# EAGLE board xambi_1.1 (EAGLE 6.5.0)
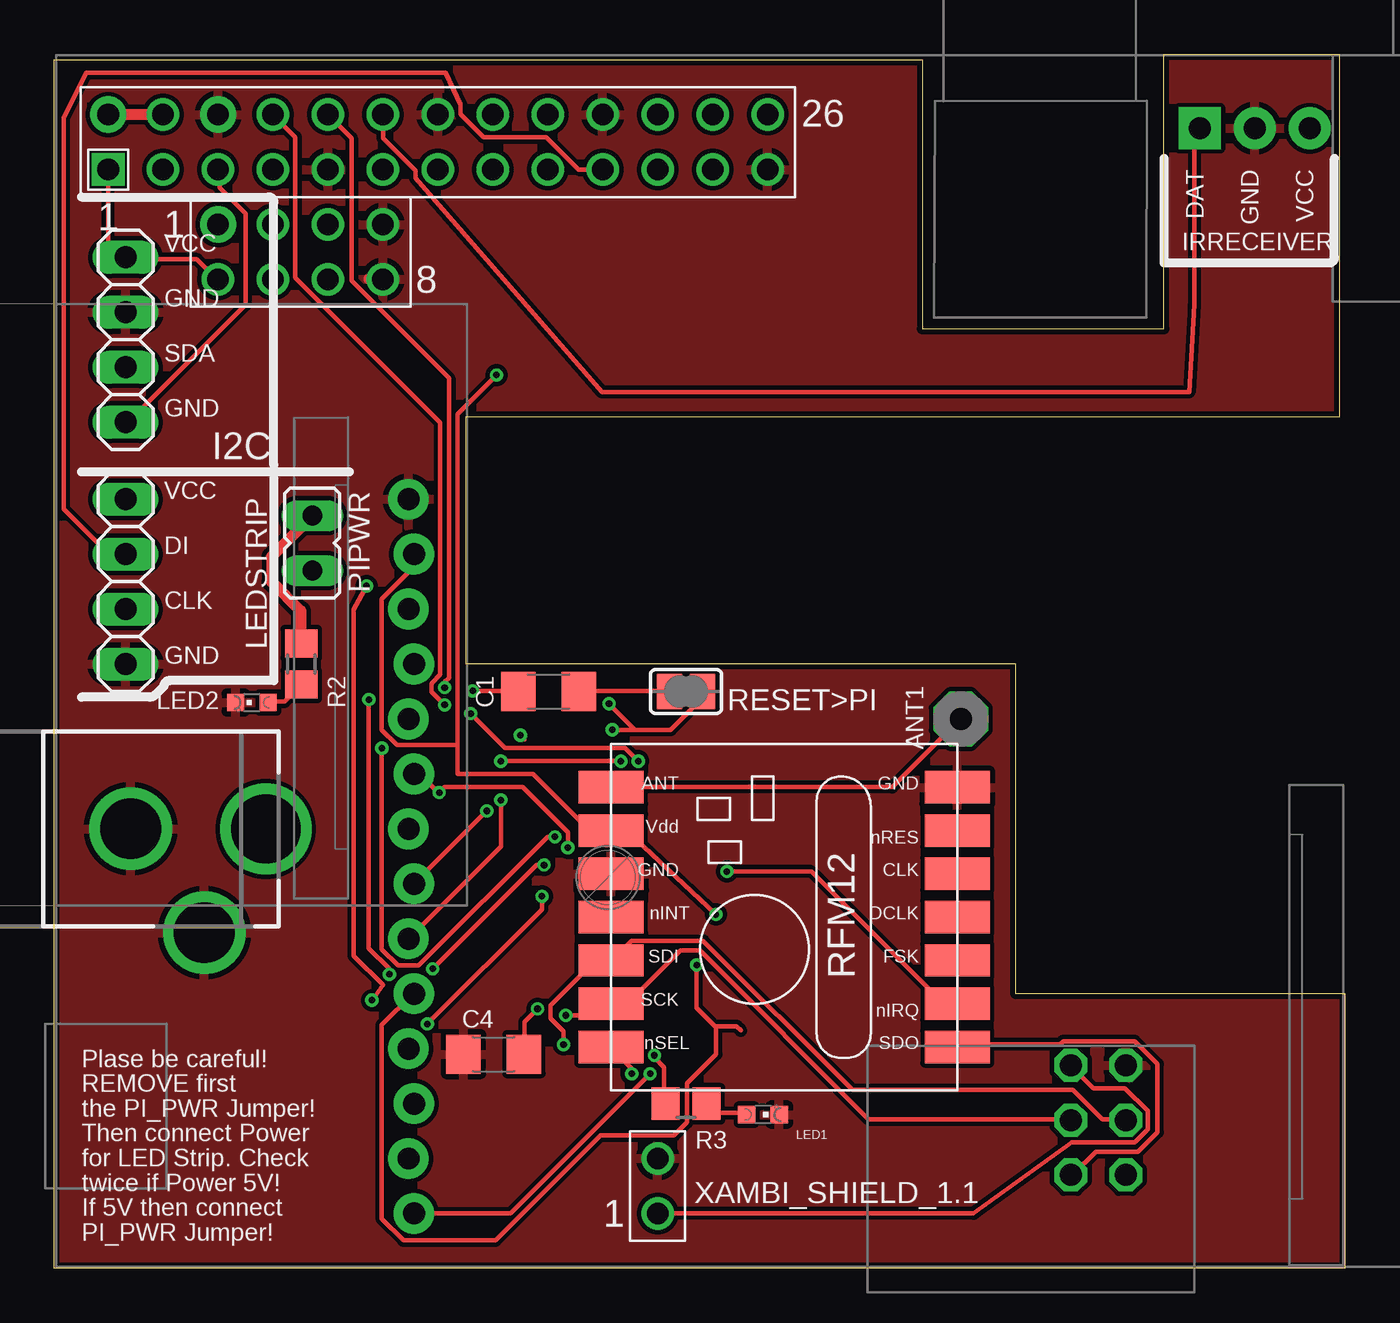
[diagram p0: board, top side]
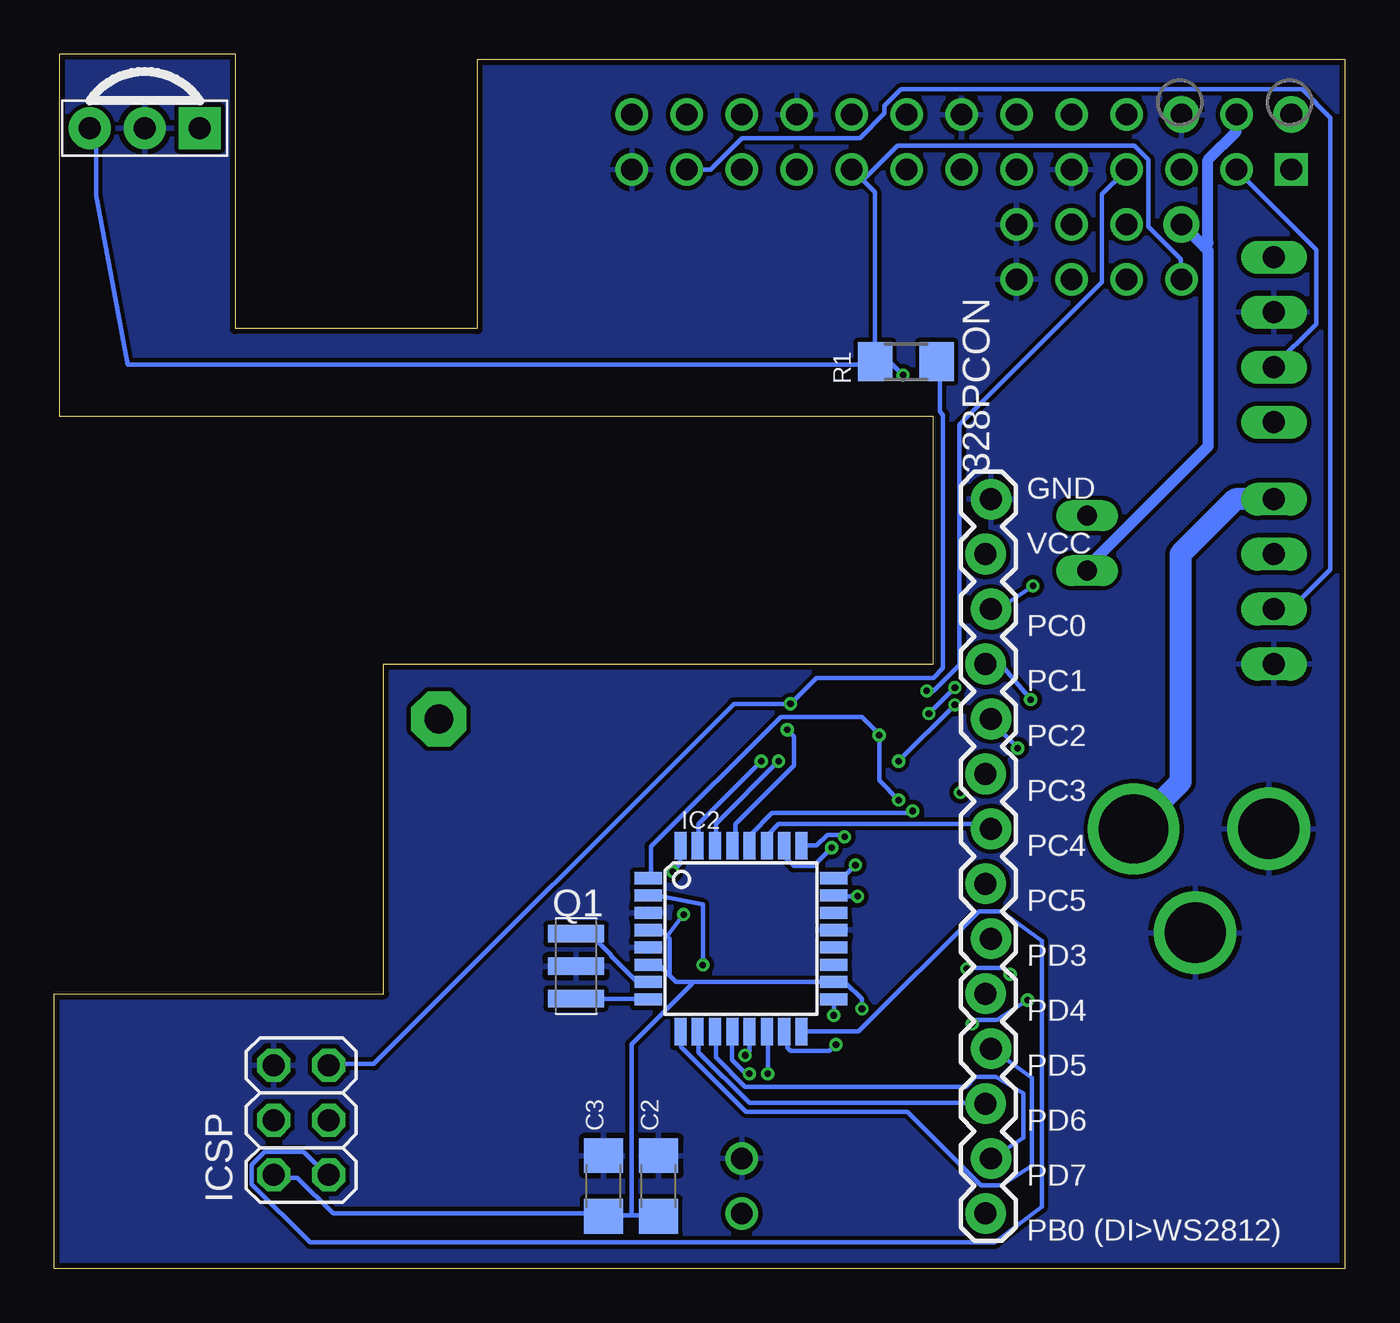
[diagram p1: board, bottom side, seen from below]

Size 59.69 x 56.13 mm. Coordinates in mm from the lower left corner, seen from the top.
Outline: 0,0 0,55.88 40.13,55.88 40.13,43.43 51.31,43.43 51.31,56.13 59.44,56.13 59.44,39.37 19.05,39.37 19.05,27.94 44.45,27.94 44.45,12.7 59.69,12.7 59.69,0 0,0
Copper layers (1*16): Top 0.035mm / dielectric 1.5mm / Bottom 0.035mm
Design rules "ITEADstudio_DRC": minimum track width 6mil, minimum drill 12mil, track to track 6mil, track to pad 6mil, pad to pad 6mil, via to via 6mil, smd to smd 0mil, copper to edge 10mil, drill to drill 10mil, minimum pad ring 10mil, minimum via ring 6mil, stop-mask expansion 2mil, vias tented up to drill 100mil, thermal gap 10mil
Net classes: 0 default: width 0.203 mm, drill 0.254 mm, clearance 0.152 mm; 1 power: width 0.508 mm, drill 0.305 mm, clearance 0.203 mm

## Footprints (pad centres in the part's own frame; a part is rotated, then mirrored left to right if it is on the bottom)
1X14_LOCK = drill 1.016 pad 1.88: 1 0,0.127; 2 2.54,-0.127; 3 5.08,0.127; 4 7.62,-0.127; 5 10.16,0.127; 6 12.7,-0.127; 7 15.24,0.127; 8 17.78,-0.127; 9 20.32,0.127; 10 22.86,-0.127; 11 25.4,0.127; 12 27.94,-0.127; 13 30.48,0.127; 14 33.02,-0.127
PAD-01 = drill 1.321 pad 2.54 octagon: 1 0,0
C1206 = smd 1.6 x 1.8: 1 -1.4,0; 2 1.4,0
DCJACK_2MM_PTH = drill 2.8: GND 0,7.35; GNDBREAK 4.8,10.75 | drill 3.2: PWR 0,13.6
1X04 = drill 1.016 long: 1 -3.81,0; 2 -1.27,0; 3 1.27,0; 4 3.81,0
TQFP32-08 = smd 1.27 x 0.559: 1 -4.293,2.8; 2 -4.293,2; 3 -4.293,1.2; 4 -4.293,0.4; 5 -4.293,-0.4; 6 -4.293,-1.2; 7 -4.293,-2; 8 -4.293,-2.8; 17 4.293,-2.8; 18 4.293,-2; 19 4.293,-1.2; 20 4.293,-0.4; 21 4.293,0.4; 22 4.293,1.2; 23 4.293,2; 24 4.293,2.8 | smd 0.559 x 1.27: 9 -2.8,-4.293; 10 -2,-4.293; 11 -1.2,-4.293; 12 -0.4,-4.293; 13 0.4,-4.293; 14 1.2,-4.293; 15 2,-4.293; 16 2.8,-4.293; 25 2.8,4.293; 26 2,4.293; 27 1.2,4.293; 28 0.4,4.293; 29 -0.4,4.293; 30 -1.2,4.293; 31 -2,4.293; 32 -2.8,4.293
2X03 = drill 1.016 octagon: 1 -2.54,-1.27; 2 -2.54,1.27; 3 0,-1.27; 4 0,1.27; 5 2.54,-1.27; 6 2.54,1.27
PNA460XM = drill 1.016 pad 1.93 square: 1 -2.54,0 | drill 1.016 pad 1.93: 2 0,0; 3 2.54,0
CHIPLED_0603 = smd 0.8 x 0.8: A 0,-0.75; C 0,0.75
JP1 = drill 0.914 long: 1 0,-1.27; 2 0,1.27
CSTCR6M = smd 0.8 x 2.6: 1 -1.5,0; 2 0,0; 3 1.5,0
R1206 = smd 1.6 x 1.803: 1 -1.422,0; 2 1.422,0
R0805 = smd 1.3 x 1.5: 1 -0.95,0; 2 0.95,0
SJ = smd 1.168 x 1.6: 1 -0.762,0; 2 0.762,0
RFM12 = smd 1.5 x 3: 1 -5,-10; 2 -3,-10; 3 -1,-10; 4 1,-10; 5 3,-10; 6 5,-10; 7 7,-10; 8 7,6; 9 5,6; 10 3,6; 11 1,6; 12 -1,6; 13 -3,6; 14 -5,6
RPI-B-V2 = drill 1 square: P1_1 0,0 | drill 1 pad 1.676: P1_2 0,2.54; P1_6 5.08,2.54; P5_1 5.08,-2.54 | drill 1: P1_3 2.54,0; P1_4 2.54,2.54; P1_5 5.08,0; P1_7 7.62,0; P1_8 7.62,2.54; P1_9 10.16,0; P1_10 10.16,2.54; P1_11 12.7,0; P1_12 12.7,2.54; P1_13 15.24,0; P1_14 15.24,2.54; P1_15 17.78,0; P1_16 17.78,2.54; P1_17 20.32,0; P1_18 20.32,2.54; P1_19 22.86,0; P1_20 22.86,2.54; P1_21 25.4,0; P1_22 25.4,2.54; P1_23 27.94,0; P1_24 27.94,2.54; P1_25 30.48,0; P1_26 30.48,2.54; P5_2 5.08,-5.08; P5_3 7.62,-2.54; P5_4 7.62,-5.08; P5_5 10.16,-2.54; P5_6 10.16,-5.08; P5_7 12.7,-2.54; P5_8 12.7,-5.08; P6_1 25.4,-48.26; P6_2 25.4,-45.72

## Placement (x,y rotation side)
328PCON  M14LOCK  [1X14_LOCK]  16.51,35.56 270 bottom
ANT1  [PAD-01]  41.91,25.4 0 top
C1  100n  [C1206]  22.86,26.67 0 top
C2  100n  [C1206]  31.75,3.81 90 bottom
C3  4.7µF  [C1206]  34.29,3.81 90 bottom
C4  4,7µF  [C1206]  20.32,9.91 0 top
CN1  LEDPower 5v/12V  [DCJACK_2MM_PTH]  -3.81,20.32 270 top
I2C  [1X04]  3.3,42.93 90 top
IC2  MEGA368  [TQFP32-08]  27.94,15.24 0 bottom
ICSP  [2X03]  48.26,6.86 90 bottom
IRRECEIVER  PNA460XM  [PNA460XM]  55.5,52.7 180 bottom
LED1  PB1  [CHIPLED_0603]  32.77,7.11 270 top
LED2  red  [CHIPLED_0603]  9.14,26.16 90 top
LEDSTRIP  [1X04]  3.3,31.75 270 top
PIPWR  [JP1]  11.94,33.53 0 top
Q1  16MHz  [CSTCR6M]  35.56,13.97 270 bottom
R1  10k  [R1206]  20.32,41.91 180 bottom
R2  680R  [R0805]  11.43,27.94 90 top
R3  680  [R0805]  29.21,7.62 180 top
RESET>PI  [SJ]  29.21,26.67 0 top
U$1  RFM12_SMDSMD  [RFM12]  31.75,15.24 90 top
XAMBI_SHIELD_1.1  XPIX Development / 2014  [RPI-B-V2]  2.5,50.8 0 top

## Library data of the parts
328PCON = SparkFun-Connectors
ANT1 = discrete
C1-C4 R1-R3 = rcl
CN1 IRRECEIVER LED1 LED2 = _adafruit
I2C ICSP LEDSTRIP = pinhead
IC2 = avr-7
PIPWR RESET>PI = jumper
Q1 = murata-filter; MPN: CSTCR6M00G53-R0; OC_FARNELL: 1170434; OC_NEWARK: 25M8759
U$1 = rfm_12
XAMBI_SHIELD_1.1 = raspberry

## Nets
+3V3: 328PCON.2 C2.1 C3.1 C4.2 I2C.4 IC2.4 IC2.6 IC2.18 ICSP.2 IRRECEIVER.3 R1.2 U$1.9 XAMBI_SHIELD_1.1.P1_1 XAMBI_SHIELD_1.1.P1_17 XAMBI_SHIELD_1.1.P5_2
+5V [power]: PIPWR.2 R2.2
+12V [power]: CN1.PWR LEDSTRIP.1
_RESET: C1.1 XAMBI_SHIELD_1.1.P1_7
ANTENNA: ANT1.1 U$1.8
CLK: LEDSTRIP.3 XAMBI_SHIELD_1.1.P1_23
DI: LEDSTRIP.2 XAMBI_SHIELD_1.1.P1_19
GND [power]: 328PCON.1 C2.2 C3.2 C4.1 CN1.GND CN1.GNDBREAK I2C.3 IC2.3 IC2.5 IC2.21 ICSP.6 IRRECEIVER.2 LED1.C LED2.C LEDSTRIP.4 Q1.2 U$1.7 U$1.10 XAMBI_SHIELD_1.1.P1_6 XAMBI_SHIELD_1.1.P1_9 XAMBI_SHIELD_1.1.P1_14 XAMBI_SHIELD_1.1.P1_20 XAMBI_SHIELD_1.1.P1_25 XAMBI_SHIELD_1.1.P5_7 XAMBI_SHIELD_1.1.P5_8 XAMBI_SHIELD_1.1.P6_2
GPIO30: XAMBI_SHIELD_1.1.P5_5
GPIO31: XAMBI_SHIELD_1.1.P5_6
I2C0_SCL/GPIO29: XAMBI_SHIELD_1.1.P5_4
I2C0_SDA/GPIO28: XAMBI_SHIELD_1.1.P5_3
IRINPUT: IRRECEIVER.1 XAMBI_SHIELD_1.1.P1_12
IRQ: IC2.32 U$1.2
MISO: IC2.16 ICSP.1 U$1.1
MOSI: IC2.15 ICSP.4 U$1.12
N$1: C1.2 RESET>PI.1
N$2: IC2.7 Q1.1
N$3 [power]: PIPWR.1 XAMBI_SHIELD_1.1.P1_2 XAMBI_SHIELD_1.1.P1_4 XAMBI_SHIELD_1.1.P5_1
N$4: IC2.8 Q1.3
N$7: LED2.A R2.1
N$19: LED1.A R3.1
N$20: IC2.13 R3.2
PB0: 328PCON.14 IC2.12
PC0: 328PCON.3 IC2.23
PC1: 328PCON.4 IC2.24
PC2: 328PCON.5 IC2.25
PC3: 328PCON.6 IC2.26
PC4: 328PCON.7 IC2.27
PC5: 328PCON.8 IC2.28
PD3: 328PCON.9 IC2.1
PD4: 328PCON.10 IC2.2
PD5: 328PCON.11 IC2.9
PD6: 328PCON.12 IC2.10
PD7: 328PCON.13 IC2.11
RESET: IC2.29 ICSP.5 R1.1 RESET>PI.2 XAMBI_SHIELD_1.1.P6_1
RX: IC2.30 XAMBI_SHIELD_1.1.P1_8
SCK: IC2.17 ICSP.3 U$1.13
SCL: I2C.1 XAMBI_SHIELD_1.1.P1_5
SDA: I2C.2 XAMBI_SHIELD_1.1.P1_3
SEL: IC2.14 U$1.14
TX: IC2.31 XAMBI_SHIELD_1.1.P1_10

## Tracks (layer width: path | path; a pad name or v marks a point on that pad's centre or on a via)
+3V3  (via drill 0.3)
  Top 0.203: v30.59,16.36 26.5,20.2 25.85,20.2 U$1.9 24.75,20.25 22.15,22.85 18.65,22.85 18.65,24.2 | 7.6,45.75 XAMBI_SHIELD_1.1.P5_2 7.5,45.75 6.6,46.65 3.45,46.65 I2C.4 2.5,47.05 XAMBI_SHIELD_1.1.P1_1 | 22.85,50.8 XAMBI_SHIELD_1.1.P1_17 | 18.65,24.2 18.65,39.5 v20.45,41.3 | 18.65,24.2 15.85,24.2 15.15,24.9 15.15,30.95 16.6,32.4 16.6,33 328PCON.2 | v22.35,12 21.75,11.4 21.75,10.05 C4.2
  Bottom 0.203: 33,2.45 34.25,2.45 C3.1 34.35,2.55 46.8,2.55 48.45,4.2 49.5,4.2 ICSP.2 | 33,2.45 31.75,2.45 C2.1 | 30.2,13.25 30.95,13.25 31.3,13.6 | 30.2,13.25 IC2.18 23.55,13.2 23.1,13.2 22.35,12.45 v22.35,12 | 31.3,13.6 31.7,14 32.2,14 IC2.6 | 31.35,15.35 31.25,15.25 31.25,13.65 31.3,13.6 | 31.35,15.35 31.6,15.6 32.2,15.6 IC2.4 | 33,2.45 33,10.35 30.2,13.15 30.2,13.25 | 31.35,15.35 v30.59,16.36 | 21.75,41.95 21.75,49.75 22.8,50.8 XAMBI_SHIELD_1.1.P1_17 22.25,50.35 20.7,51.9 9.75,51.9 9.1,51.25 9.1,48.15 7.6,46.65 7.6,45.75 XAMBI_SHIELD_1.1.P5_2 | 21.75,41.95 21.75,41.78 56.28,41.78 57.75,49.6 57.75,52.7 IRRECEIVER.3 | 21.75,41.95 R1.2 21.65,42.5 v20.45,41.3
+5V
  Top 0.508: R2.2 11.4,28.9 11.4,30.4 10.05,31.75 10.05,32.9 11.9,34.75 PIPWR.2
+12V
  Bottom 1.016: LEDSTRIP.1 5.08,35.56 7.62,33.02 7.62,22.49 CN1.PWR
_RESET  (via drill 0.3)
  Top 0.203: v19.35,26.7 21.45,26.7 C1.1
  Bottom 0.203: v19.35,26.7 19.05,26.7 17.85,27.9 17.85,39 11.25,45.6 11.25,49.65 10.2,50.7 XAMBI_SHIELD_1.1.P1_7
ANTENNA
  Top 0.203: U$1.8 38.75,22.25 ANT1.1
CLK
  Bottom 0.203: XAMBI_SHIELD_1.1.P1_23 29.35,50.8 27.9,52.25 22.45,52.25 21.3,53.4 21.3,53.75 20.55,54.5 2,54.5 0.7,53.2 0.7,32.3 2.5,30.5 LEDSTRIP.3
DI
  Top 0.203: XAMBI_SHIELD_1.1.P1_19 24.25,50.8 22.75,52.3 19.85,52.3 18.8,53.35 18.8,53.8 18.1,55.26 1.49,55.26 0.45,53.2 0.45,35.1 2.5,33.05 LEDSTRIP.2
GND
  Top 0.508: 2.5,44.55 I2C.3 | XAMBI_SHIELD_1.1.P5_7 15.15,48.25 | 14.55,45.75 XAMBI_SHIELD_1.1.P5_8
  Top 0.635: U$1.10 25.65,18.3 25.58,18.41
  Bottom 0.508: 31.85,14.85 IC2.5
  pour Top: 0,0 0,55.88 59.69,55.88 59.69,0
  pour Bottom: 0,0 0,55.88 59.69,55.88 59.69,0
IRINPUT
  Top 0.203: XAMBI_SHIELD_1.1.P1_12 15.2,52.25 16.7,50.75 16.7,50.4 25.32,40.51 52.47,40.51 52.7,44.55 52.7,52.7 IRRECEIVER.1
IRQ  (via drill 0.3)
  Top 0.203: v31.1,18.35 35,18.35 41.1,12.25 U$1.2
  Bottom 0.203: v31.1,18.35 30.75,18.7 30.75,19.5 IC2.32
MISO
  Top 0.203: U$1.1 41.85,10.35 46.5,10.35 46.65,10.5 49.95,10.5 51,9.45 51,6.3 50.1,5.4 48.15,5.4 47.1,4.35 ICSP.1
  Bottom 0.203: IC2.16 25.05,10.95 22.5,10.95 16.95,16.5 15.9,16.5 14.04,15.15 14.04,2.85 16.2,1.2 47.85,1.2 50.55,3.9 50.55,4.8 49.95,5.4 48.15,5.4 47.1,4.35 ICSP.1
MOSI  (via drill 0.3)
  Top 0.203: v23.55,10.35 23.55,10.95 22.95,11.55 22.95,12.15 24.9,14.1 25.65,14.1 U$1.12 25.8,14.25 26.7,15.15 30,15.15 36.9,8.25 47.1,8.25 48.45,6.9 49.5,6.9 ICSP.4
  Bottom 0.203: v23.55,10.35 23.85,10.05 25.65,10.05 25.8,10.2 25.8,10.8 IC2.15
N$1
  Top 0.203: RESET>PI.1 28.35,26.7 24.3,26.7 C1.2
N$2
  Bottom 0.203: IC2.7 32.25,13.25 32.75,13.25 33.95,14.45 33.95,14.5 34.9,15.45 35.55,15.45 Q1.1
N$3
  Top 0.508: XAMBI_SHIELD_1.1.P1_4 5,53.35 XAMBI_SHIELD_1.1.P1_2
  Bottom 0.508: 6.53,47.23 7.55,48.25 XAMBI_SHIELD_1.1.P5_1 | 6.53,47.23 6.35,47.05 6.35,38 11.9,32.45 11.9,32.3 PIPWR.1 | XAMBI_SHIELD_1.1.P1_4 5.05,53.3 5.05,52.55 6.35,51.25 6.35,47.4 6.53,47.23
N$4
  Bottom 0.203: IC2.8 32.25,12.45 35.55,12.45 Q1.3
N$7
  Top 0.203: R2.1 11.4,26.95 10.65,26.2 9.9,26.2 9.9,26.25 LED2.A
N$19
  Top 0.203: LED1.A 31.95,7.2 30.6,7.2 30.3,7.5 R3.1
N$20  (via drill 0.3)
  Top 0.203: v27.75,9.85 27.75,9.75 28.2,9.3 28.2,7.65 R3.2
  Bottom 0.203: v27.75,9.85 27.55,10.05 27.55,10.9 IC2.13
PB0  (via drill 0.3)
  Top 0.203: v27.55,9 21.1,2.55 328PCON.14
  Bottom 0.203: v27.55,9 27.7,9 28.35,9.65 28.35,10.9 IC2.12
PC0  (via drill 0.3)
  Top 0.203: v22.55,17.2 22.55,16.6 v17.25,11.3 | v14.69,12.4 15.2,13.1 13.85,14.45 13.85,30.45 v14.44,31.55
  Bottom 0.203: v22.55,17.2 23.6,17.2 IC2.23 | v17.25,11.3 17.05,11.5 16.1,11.5 v14.69,12.4 | v14.44,31.55 16,30.5 16.35,30.5 328PCON.3
PC1  (via drill 0.3)
  Top 0.203: v22.65,18.65 22.3,18.65 v17.5,13.85 | v15.5,13.6 15.5,13.85 14.55,14.8 v14.55,26.3
  Bottom 0.203: v22.65,18.65 23.25,18.05 23.6,18.05 IC2.24 | v17.5,13.85 17.45,13.9 15.8,13.9 v15.5,13.6 | v14.55,26.3 15.9,27.9 16.6,27.9 328PCON.4
PC2  (via drill 0.3)
  Top 0.203: v23.15,19.95 22.8,19.95 16.85,14 15.9,14 15.15,14.75 v15.15,24.05
  Bottom 0.203: v23.15,19.95 23.25,20.05 23.95,20.05 24.45,19.55 25.1,19.55 IC2.25 | v15.15,24.05 16.35,25.25 16.35,25.4 328PCON.5
PC3  (via drill 0.3)
  Top 0.203: v23.75,19.45 23.75,20.15 21.65,22.25 18.05,22.25 v17.8,22 17.7,22.05 16.95,22.8 16.65,22.8 328PCON.6
  Bottom 0.203: v23.75,19.45 24.6,18.6 25.5,18.6 25.9,19 25.9,19.5 IC2.26
PC4
  Bottom 0.203: IC2.27 26.7,19.55 26.7,20.05 26.2,20.55 16.6,20.55 16.4,20.35 328PCON.7
PC5  (via drill 0.3)
  Top 0.203: v20,21.15 16.65,17.8 328PCON.8
  Bottom 0.203: v20,21.15 20.1,21.05 26.5,21.05 27.5,20.05 27.5,19.55 IC2.28
PD3  (via drill 0.3)
  Top 0.203: v20.65,21.65 20.65,19.5 16.4,15.25 328PCON.9 | v21.55,24.65 21.75,24.45
  Bottom 0.203: v20.65,21.65 21.55,22.55 v21.55,24.65 21.6,24.75 22.35,25.5 26.1,25.5 32.1,19.5 32.1,18.15 IC2.1 32.2,18.05
PD4  (via drill 0.3)
  Top 0.203: v29.7,14.03 29.7,12.05 30.55,11.2 30.6,11.2 | 30.6,11.2 31.55,11.2 31.75,11 | 328PCON.10 16.6,12.7 15.15,11.25 15.15,2.3 16.15,1.3 20.4,1.3 25.25,6.15 28.65,6.15 29.25,6.75 29.25,8.55 30.6,9.9 30.6,11.2
  Bottom 0.203: IC2.2 32.2,17.2 31.6,17.2 29.7,16.82 v29.7,14.03
PD5
  Bottom 0.203: IC2.9 30.7,10.9 30.7,10.25 27.7,7.25 20.25,7.25 16.85,3.85 15.9,3.85 14.49,4.75 14.49,8.8 16.35,10.15 328PCON.11
PD6
  Bottom 0.203: IC2.10 29.9,10.9 29.9,10 27.55,7.65 16.65,7.65 328PCON.12
PD7
  Bottom 0.203: IC2.11 29.1,10.9 29.1,9.75 27.75,8.4 17.55,8.4 17.1,8.85 16.15,8.85 14.89,8.1 14.89,6.05 16.35,5.1 328PCON.13
RESET  (via drill 0.3)
  Top 0.203: XAMBI_SHIELD_1.1.P6_1 42.5,2.55 47.05,5.83 49.95,5.83 50.55,6.43 50.55,7.28 49.5,8.33 48.05,8.33 47,9.38 ICSP.5 | 26.85,24.9 28.5,24.9 29.85,26.25 29.85,26.55 RESET>PI.2 | 26.85,24.9 v25.8,24.9 | 26.85,24.9 v25.65,26.1
  Bottom 0.203: v25.8,24.9 25.5,24.6 25.5,23.25 28.2,20.55 28.2,19.65 IC2.29 | R1.1 18.75,41.85 18.75,39.6 18.6,39.45 18.6,27.75 19.05,27.3 24.45,27.3 v25.65,26.1 28.27,26.1 44.92,9.45 46.95,9.45 ICSP.5
RX  (via drill 0.3)
  Top 0.203: v20.65,23.45 v26.2,23.45 | v18.05,26.05 17.45,26.65 17.45,27.05 17.85,27.45 17.85,39.1 11.15,45.8 11.15,52.3 10.15,53.3 XAMBI_SHIELD_1.1.P1_8
  Bottom 0.203: v26.2,23.45 29.1,20.55 29.1,19.55 IC2.30 | v18.05,26.05 v20.65,23.45
SCK  (via drill 0.3)
  Top 0.203: v23.65,11.7 25.25,11.7 25.75,12.2 U$1.13 25.8,12.3 26.55,12.3 28.95,14.7 29.85,14.7 37.65,6.9 46.95,6.9 ICSP.3
  Bottom 0.203: v23.65,11.7 23.65,12.4 IC2.17
SCL
  Top 0.203: XAMBI_SHIELD_1.1.P1_5 7.65,50.7 7.65,49.95 8.85,48.75 8.85,44.55 3.45,39.15 I2C.1
SDA
  Bottom 0.203: XAMBI_SHIELD_1.1.P1_3 4.95,50.7 1.35,47.1 1.35,43.65 3.3,41.7 I2C.2
SEL  (via drill 0.3)
  Top 0.203: v26.7,9 26.7,9.25 25.75,10.2 U$1.14
  Bottom 0.203: v26.7,9 26.7,10.9 IC2.14
TX  (via drill 0.3)
  Top 0.203: v27,23.45 26.4,24.05 20.85,24.05 v19.25,25.65 | v18.05,26.85 18.05,27.1 18.25,27.3 18.25,41.15 13.75,45.65 13.75,52.25 XAMBI_SHIELD_1.1.P1_10
  Bottom 0.203: v27,23.45 29.9,20.55 29.9,19.55 IC2.31 | v18.05,26.85 v19.25,25.65

## Text on the board
tNames: DAT | GND | VCC | VCC | GND | SDA | GND | VCC | DI | CLK | GND | Plase be careful! / REMOVE first / the PI_PWR Jumper! / Then connect Power / for LED Strip. Check / twice if Power 5V! / If 5V then connect / PI_PWR Jumper!
bNames: GND | VCC | PC0 | PC1 | PC2 | PC3 | PC4 | PC5 | PD3 | PD4 | PD5 | PD6 | PD7 | PB0 (DI>WS2812)